# Altium PCB TPS3702_Breakout.PcbDoc
Units mil, origin at the board's own origin, x right, y up, seen from the top; angles counter-clockwise.
Board outline 800 x 500 mil, 2 copper layers (Top Layer, Bottom Layer); 4 components, 6 nets, 14 pads, 0 vias.
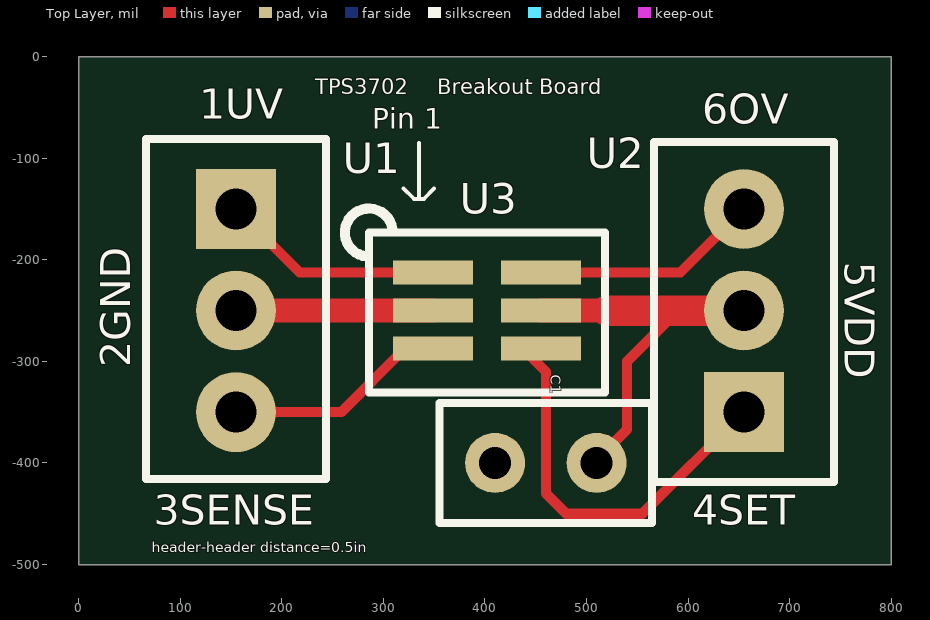
[diagram p0: Top Layer view]
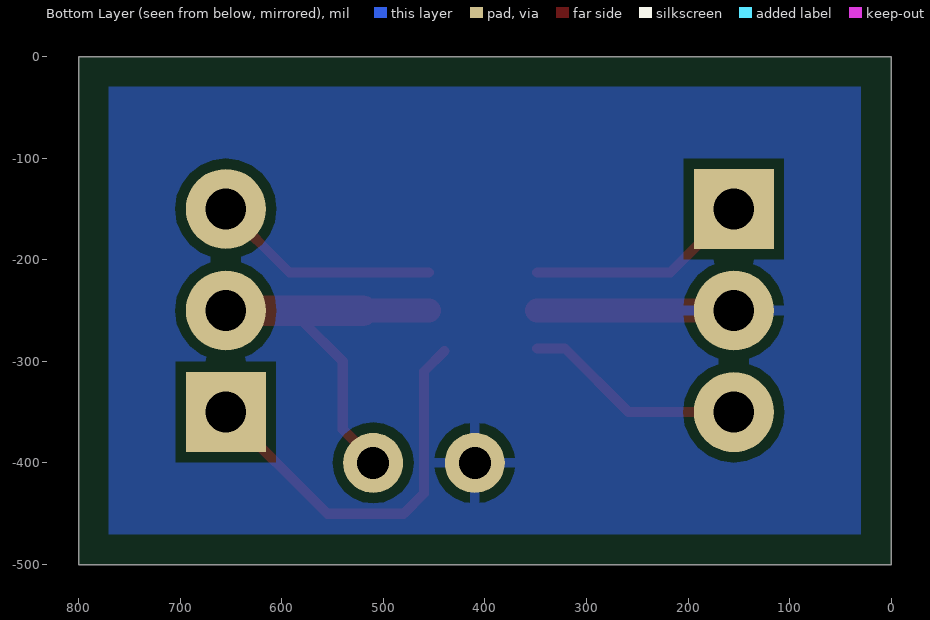
[diagram p1: Bottom Layer view, seen from below]
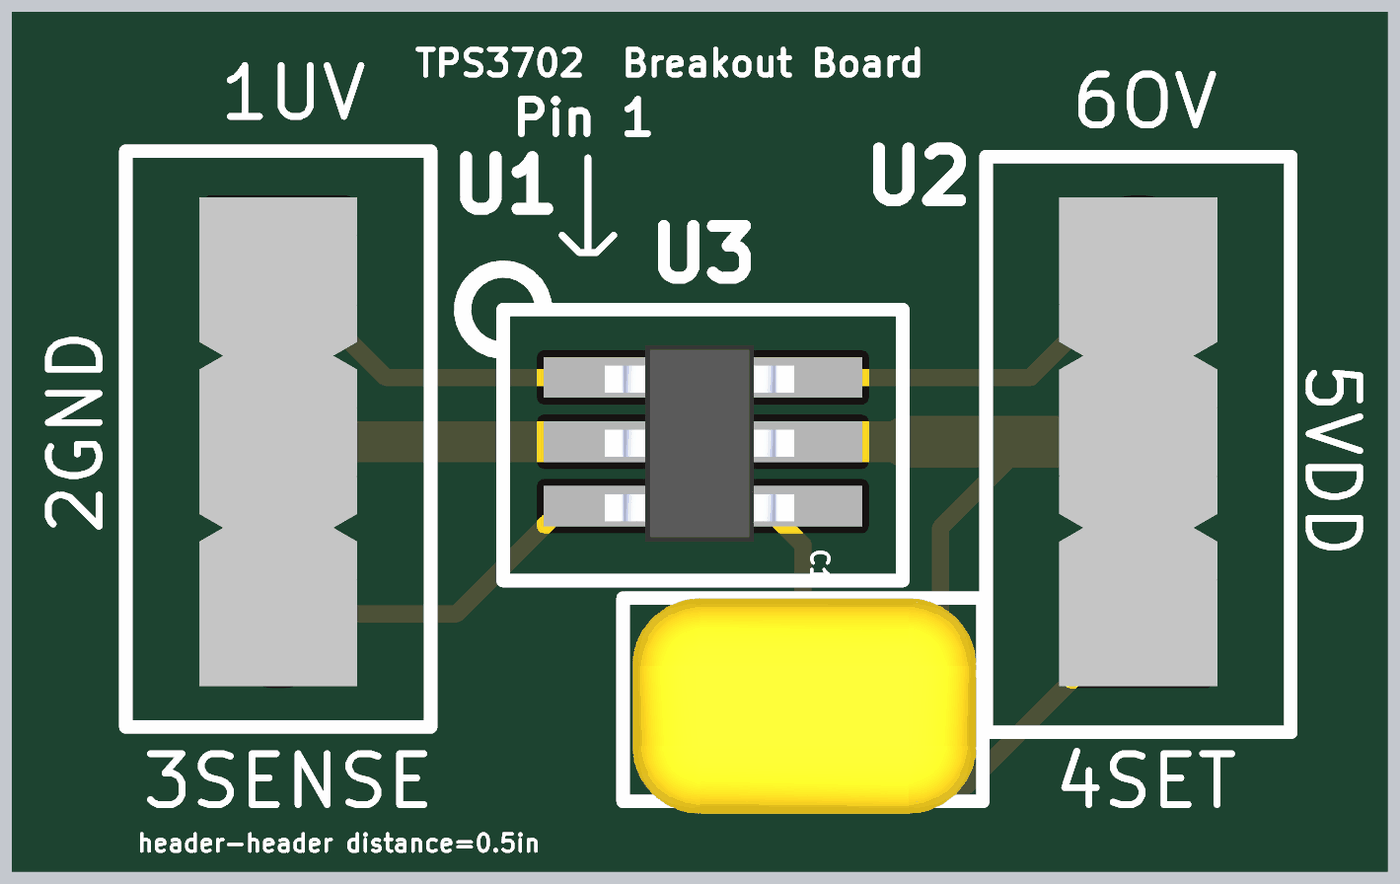
[diagram p2: 3D render of the assembled board from above, using the file's embedded part models]

## Layer stack, top to bottom
Top Solder: solder mask 0.4, Solder Resist, Dk 3.5
Top Layer: signal copper 1.4
Dielectric 1: dielectric 12.6, FR-4, Dk 4.8
Bottom Layer: signal copper 1.4
Bottom Solder: solder mask 0.4, Solder Resist, Dk 3.5

## Board outline
0,0 800,0 800,-500 0,-500

## Design rules (kind name [scope] priority, off if disabled: settings)
Clearance [All] p1: gap=10 ignorepadtopadclearanceinfootprint=FALSE except(0: Arc-Hole Track-Hole SMDPad-Hole THPad-Hole Via-Hole Fill-Hole Poly-Hole Region-Hole Text-Hole)
PolygonConnect [All] p1: connectstyle=Relief reliefconductorwidth=10 reliefentries=4 polygonreliefangle="90 Angle" airgapwidth=10
RoutingVias [All] p1: holewidth=28 width=50 viastyle="Through Hole" minholewidth=28 minwidth=50 maxholewidth=28 maxwidth=50
SolderMaskExpansion [All] p1: expansion=4 istentingtop=FALSE
Width [All] p1: maxlimit=100 minlimit=10 preferedwidth=10 bottomlayer_maxwidth=10 minimp=50.000000 maximp=50.000000 favimp=50.000000
30 further rules are at their usual default settings.

## Components (designator, comment, footprint, x,y, rotation, side; value= is the part's Value field where it differs from the comment)
C1 "VCC Cap" "VCC Cap" 510,-400 r180 top
U1 "3-Pin Header" "3-Pin Header" 155,-150 r0 top
U2 "3-Pin Header" "3-Pin Header" 655,-350 r180 top
U3 "TPS3702" TPS3702 348.7,-212.6 r0 top

## Footprints (in the part's own frame and the unit in brackets; to place one, negate y for a bottom-side part, rotate by r counter-clockwise, add the part's x,y. Pads: shape width x height; smd on the part's side, far side on the other; paste and mask are expansions set on the pad)
"3-Pin Header" [mm]
  rect 2x2 hole 1.02: 1(0,0)
  round 2 hole 1.02: 2(0,-2.54) 3(0,-5.08)
  silkscreen extent -2.25,-6.75 2.25,1.75, body extent -1.17,-6.15 1.17,1.07, height 5.35
TPS3702 [mm]
  rect 2x0.6 smd: 1(0,0) 2(0,-0.95) 3(0,-1.9) 4(2.7,-1.9) 5(2.7,-0.95) 6(2.7,0)
  silkscreen extent -2.2,-3 4.3,1.6, body extent -0.1,-2.43 2.7,0.48, height 1.01
"VCC Cap" [mm]
  round 1.5 hole 0.8: 1(0,0) 2(2.54,0)
  silkscreen extent -1.38,-1.5 3.92,1.5, body extent -1.54,-1.5 4.04,1.69, height 4.82

## Part data
C1: "Noise Reducing Cap"
U1 U2: "standard 0.1 inch socket for headers"
U3: "voltage watchdog ic"

## Nets (pads, with @x,y where several pads share a name; then routed paths per layer and width w, separated by ;. In a path a pad name is that pad's centre, name@x,y a point inside that pad or via, vN(x,y) a via of type N, cw(c..) or ccw(c..) an arc to the next point about the centre after c; other vN are vias at no path point)
+5: C1.1 U2.2 U3.5 | length 369
  Top Layer w10: C1.1 510,-397.03 540,-367.03 540,-300 580,-260 580,-250
  Top Layer w23.62: U3.5 510,-250
  Top Layer w30: 520,-250 580,-250 U2.2
GND: C1.2 U1.2 U3.2 | length 193.7
  Top Layer w23.62: U1.2 U3.2
OV: U2.3 U3.6 | length 225.9
  Top Layer w10: U3.6 592.4,-212.6 U2.3
SENSE: U1.3 U3.3 | length 219.6
  Top Layer w10: U1.3 258.54,-350 321.14,-287.4 U3.3
SET: U2.1 U3.4 | length 393
  Top Layer w10: U3.4@440,-290 460,-310 460,-430 480,-450 555,-450 U2.1
UV: U1.1 U3.1 | length 219.6
  Top Layer w10: U1.1 217.6,-212.6 U3.1

## Polygon pours and split planes (outlines as drawn)
GND on Bottom Layer "GND_L02_P000" (solid, pour order 0): 30,-30 770,-30 770,-470 30,-470

## Silkscreen, mask and mechanical layers (free items; w line width, h text height)
Top Overlay:
  lines w3.94: 320,-130 330,-140 335,-140 ; 335,-85 335,-140 ; 350,-130 340,-140 335,-140
  text "TPS3702" at 233,-37 h15
  text "Breakout Board" at 353,-37 h15
  text "1UV" at 118.94,-61.06 h29.53
  text "6OV" at 613.94,-66.06 h29.53
  text "Pin 1" at 288.94,-71.06 h20
  text "5VDD" at 753.94,-201.94 h29.53 r270
  text "2GND" at 51.06,-306.06 h29.53 r90
  text "3SENSE" at 73.94,-461.06 h29.53
  text "4SET" at 603.94,-461.06 h29.53
  text "header-header distance=0.5in" at 72,-488 h10
Board Outline:
  the board outline again, w3.94